# Altium PCB PCB2.PcbDoc
Units mm, origin at the board's own origin, x right, y up, seen from the top; angles counter-clockwise.
Board outline 139.83 x 163.58 mm, 2 copper layers (Top Layer, Bottom Layer); 66 components, 65 nets, 277 pads, 15 vias.
Unrouted connection lines stored in the file: 4.
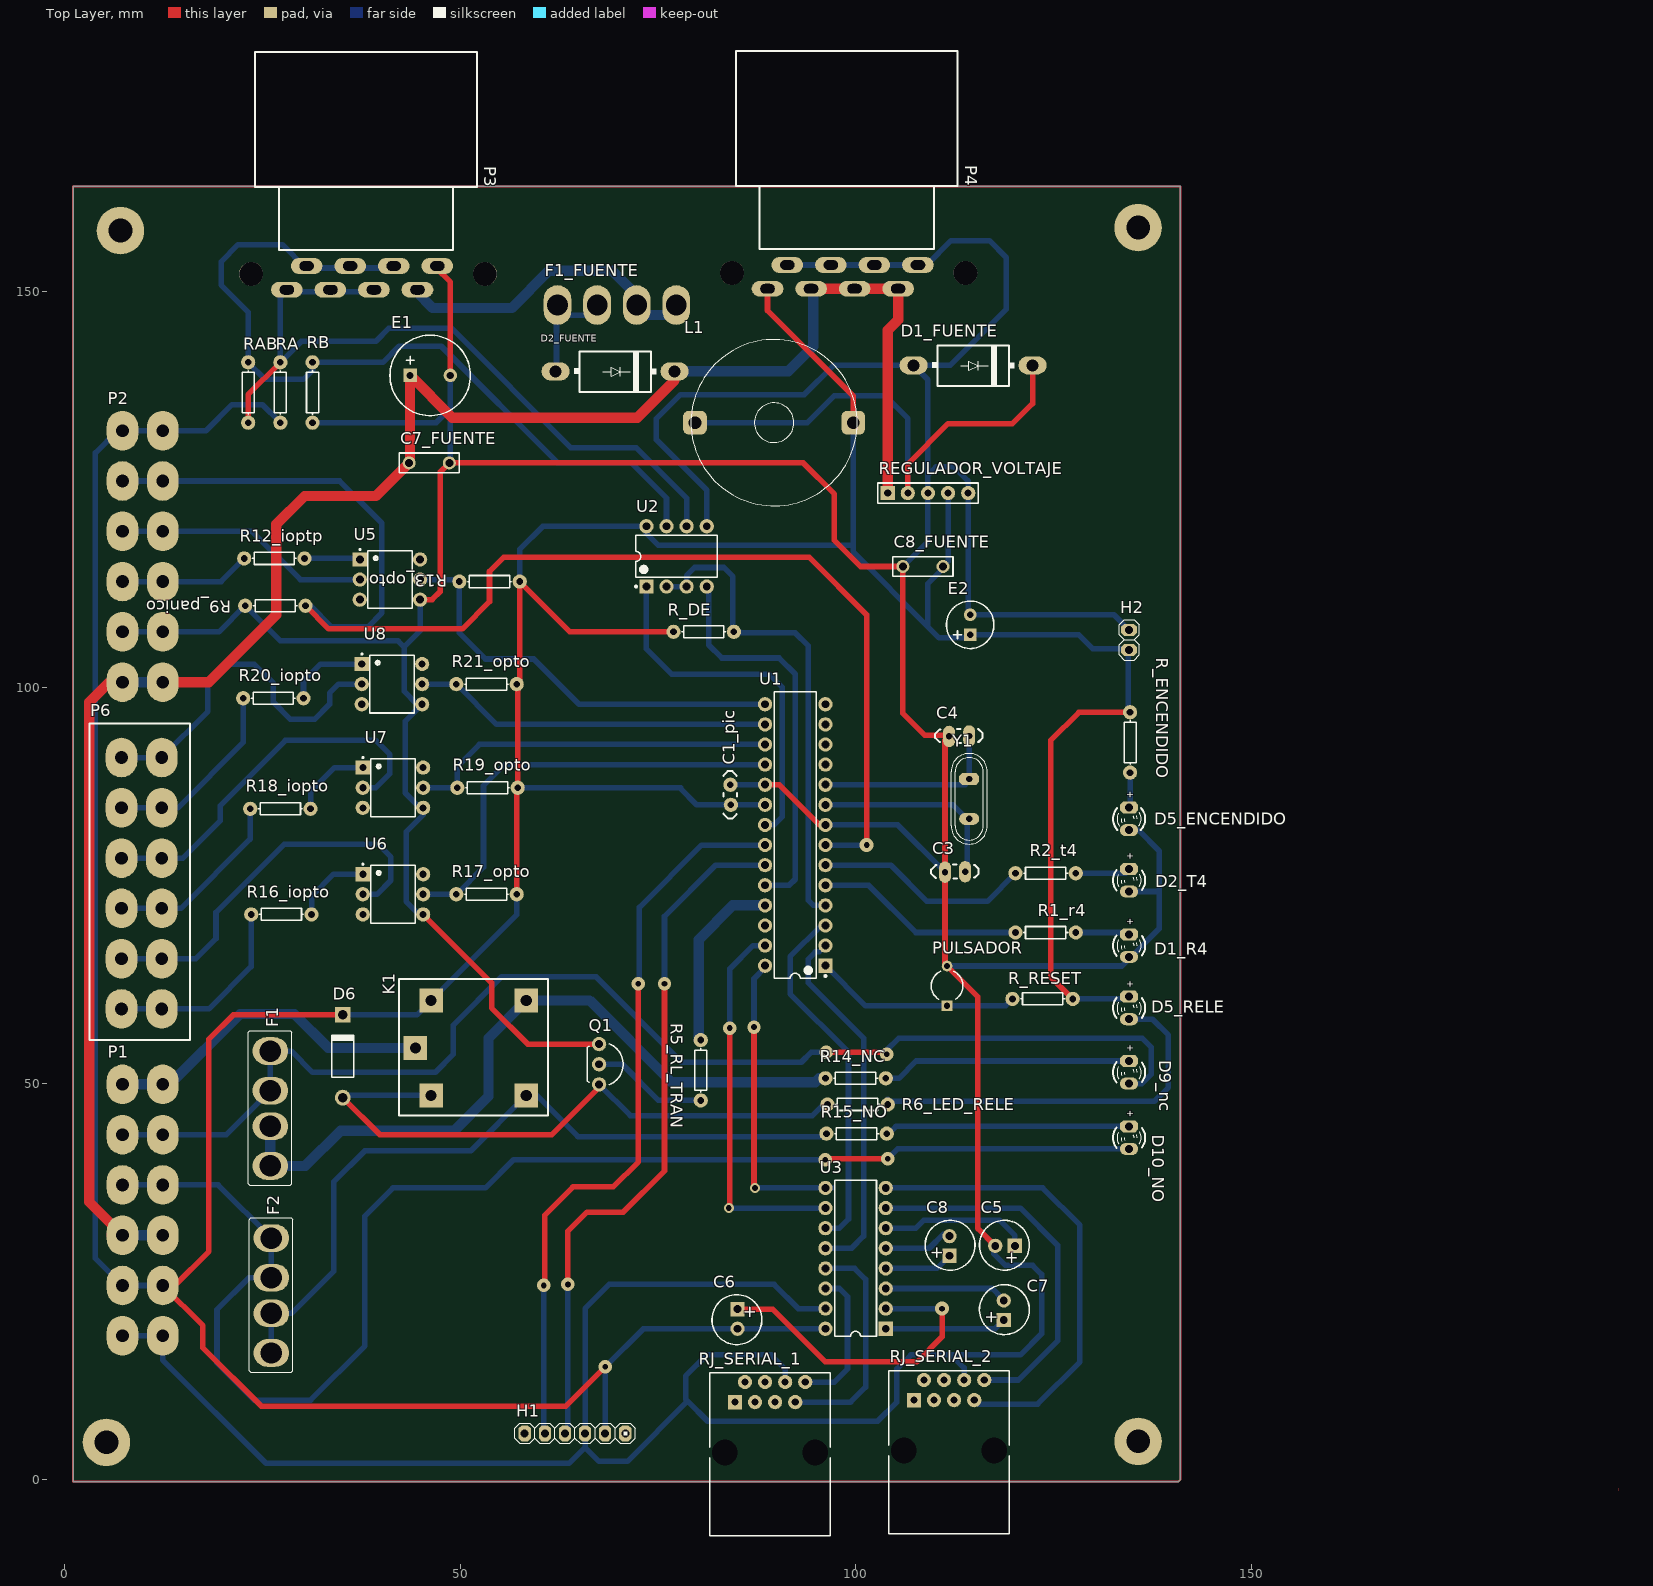
[diagram p0: Top Layer view]
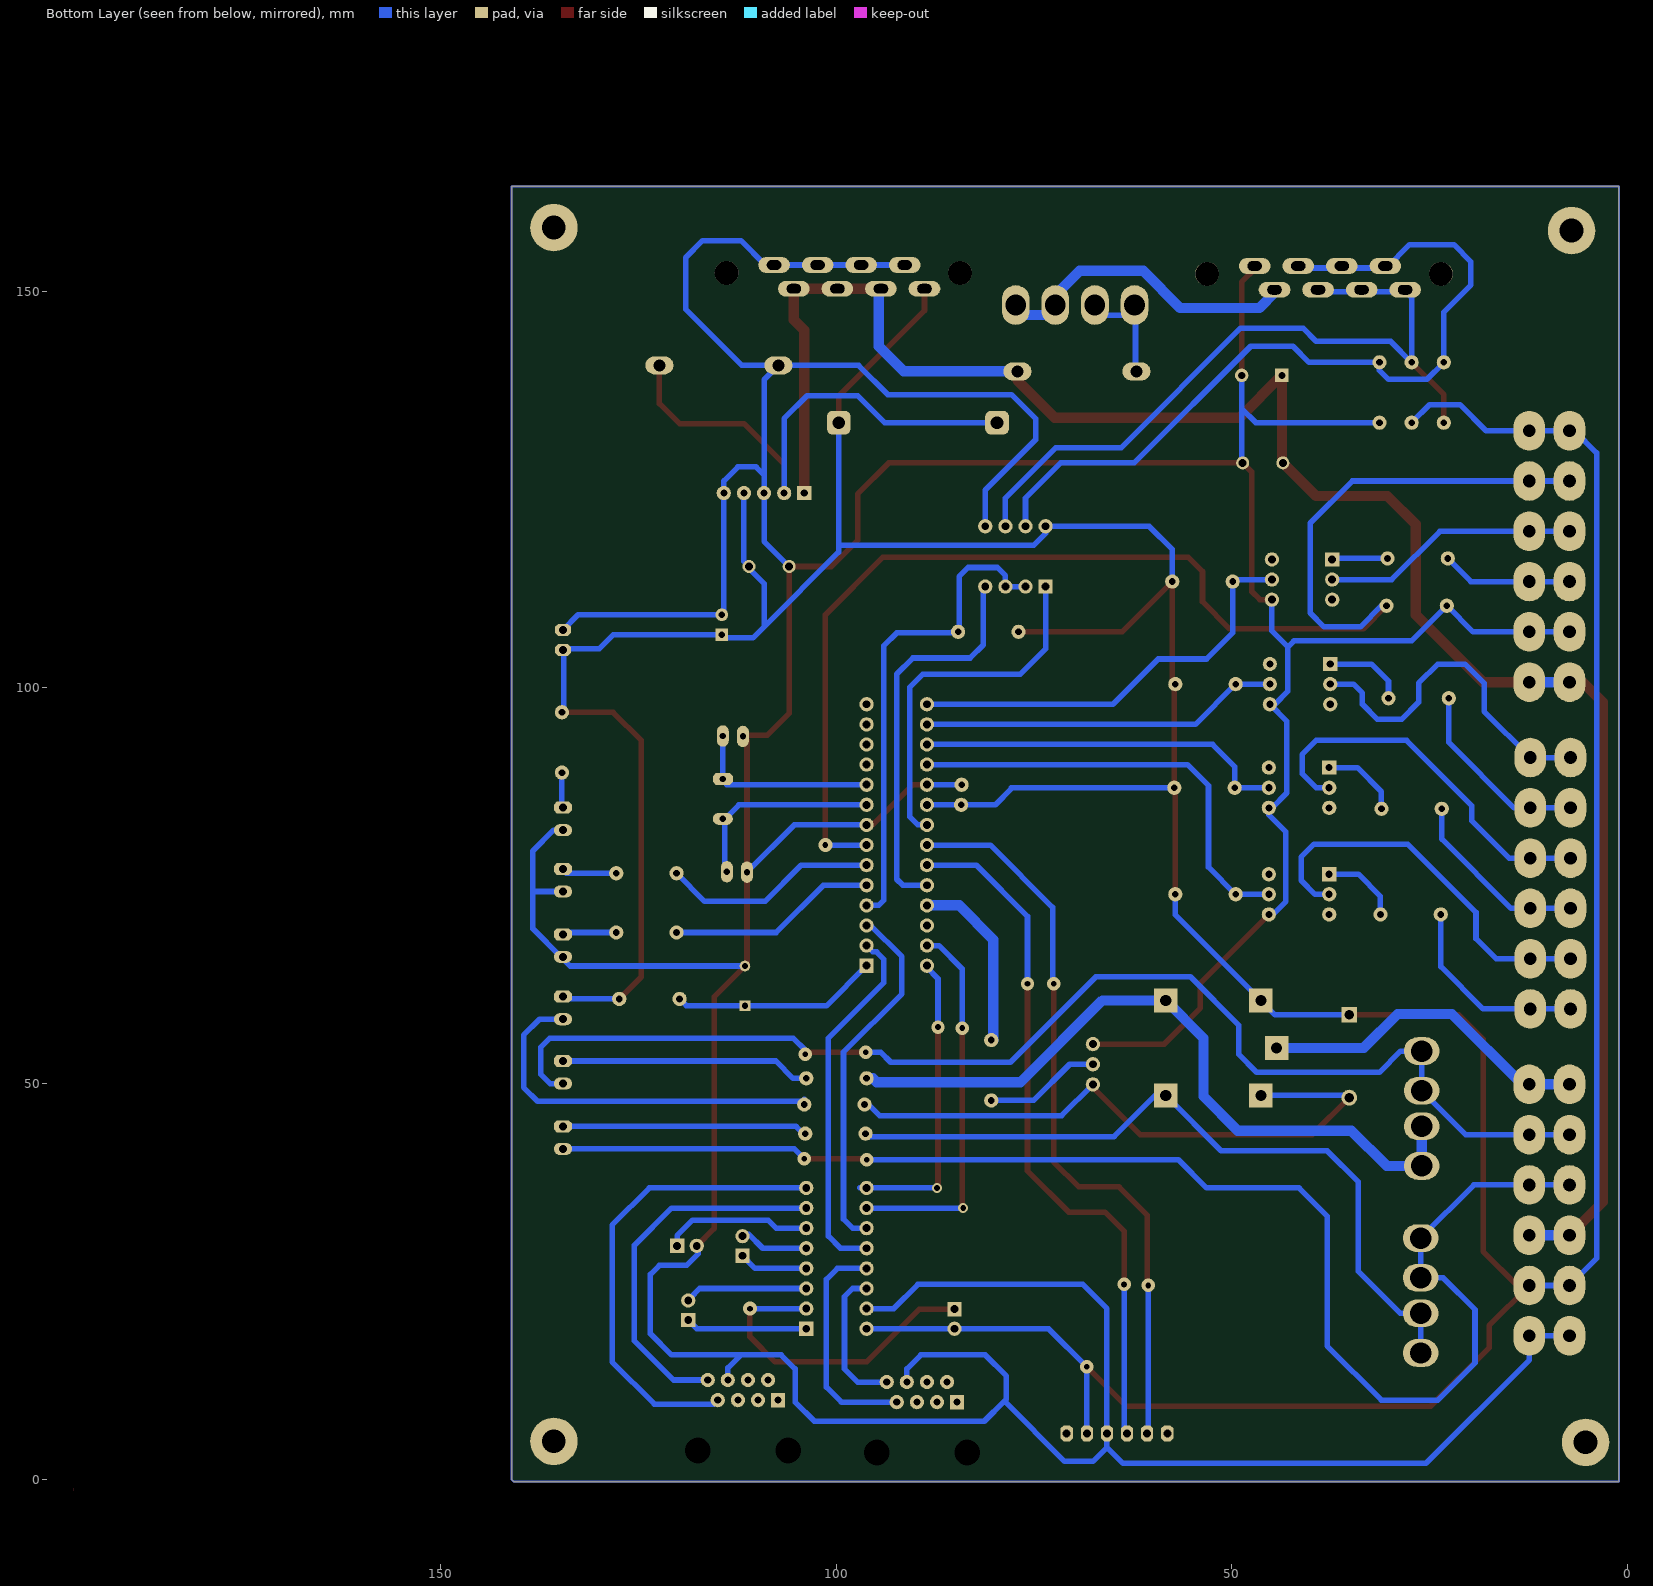
[diagram p1: Bottom Layer view, seen from below]

## Layer stack, top to bottom
Top Solder: solder mask 0.0102, Solder Resist, Dk 3.5
Top Layer: signal copper 0.0356
Dielectric 1: dielectric 0.32, FR-4, Dk 4.8
Bottom Layer: signal copper 0.0356
Bottom Solder: solder mask 0.0102, Solder Resist, Dk 3.5

## Board outline
1.143,-0.254 1.143,163.322 140.97,163.322 140.97,0 140.716,-0.254

## Design rules (kind name [scope] priority, off if disabled: settings)
Clearance [All] p1: gap=0.5
PolygonConnect [All] p1: connectstyle=Relief reliefconductorwidth=0.254 reliefentries=4 polygonreliefangle="90 Angle" airgapwidth=0.254
RoutingVias [All] p1: holewidth=0.711 width=1.27 viastyle="Through Hole" minholewidth=0.711 minwidth=1.27 maxholewidth=0.711 maxwidth=1.27
SolderMaskExpansion [All] p1: expansion=0.102
Width [All] p1: maxlimit=1.3 minlimit=0.7 preferedwidth=0.7
30 further rules are at their usual default settings.

## Components (designator, comment, footprint, x,y, rotation, side; value= is the part's Value field where it differs from the comment)
C1_pic "Cap" Lenteja#1 84.201,86.487 r90 top
C3 "Cap" Lenteja#2 112.522,76.708 r0 top
C4 "Cap" Lenteja#2 113.03,93.853 r0 top
C5 "Cap Pol1" "Radial 6.3x11" 118.745,29.591 r180 top
C6 "Cap Pol1" "Radial 6.3x11" 84.963,20.193 r270 top
C7 "Cap Pol1" "Radial 6.3x11" 118.745,21.463 r90 top
C7_FUENTE "VP44BY224JB" VP44-2.5 46.101,128.397 r0 top
C8 "Cap Pol1" "Radial 6.3x11" 111.887,29.591 r90 top
C8_FUENTE "VP44BY224JB" VP44-2.5 108.458,115.316 r0 top
D1_FUENTE "Diodo" 1N4000 122.301,140.716 r180 top
D1_R4 "LED0" "LED3MM green" 134.493,67.437 r90 top
D2_FUENTE "Diodo" 1N4000 77.089,139.954 r180 top
D2_T4 "LED0" "LED3MM green" 134.493,75.692 r90 top
D5_ENCENDIDO "LED0" "LED3MM green" 134.493,83.439 r90 top
D5_RELE "LED0" "LED3MM green" 134.493,59.563 r90 top
D6 "Diode 1N4001" DO-41 35.179,53.467 r90 top
D9_nc "LED0" "LED3MM green" 134.493,51.435 r90 top
D10_NO "LED0" "LED3MM green" 134.493,43.18 r90 top
E1 "Cap Pol1" C1000UF 43.688,139.446 r0 top
E2 "Cap2" C1UF 114.427,106.68 r90 top
F1 "Fuse" PORTA_FUSE 26.035,46.863 r90 top
F1_FUENTE "Fuse" fusible1 62.357,148.336 r0 top
F2 "Fuse" PORTA_FUSE 26.162,23.241 r90 top
H1 "Header 6" "Header 1X6" 63.246,5.842 r0 top
H2 "Header" "Header 1X2" 134.493,104.775 r90 top
K1 "Relay-SPDT" RELE 46.355,48.514 r0 top
L1 "Inductor Adj" Inductor_redondo 89.662,133.477 r0 top
P1 "Header 6" PCBComponent_1#1 1235.329,1270.381 r0 top
P2 "Header 6" PCBComponent_1#1 1235.329,1352.931 r0 top
P3 "MHDR1X8" 8PEQ_TAIYUE_OK 39.624,151.765 r180 top
P4 "MHDR1X8" 8PEQ_TAIYUE_OK 100.33,151.892 r180 top
P6 "Header 6" PCBComponent_1#2 1242.695,1314.704 r0 top
PULSADOR "Cap2" CAPR5-4X5 111.506,62.357 r90 top
Q1 "2N3904" 2N3904_OK 67.564,52.451 r0 top
R1_r4 "Res1" AXIAL-0.3 123.952,69.088 r0 top
R2_t4 "Res1" AXIAL-0.3 123.952,76.581 r0 top
R5_RL_TRAN "Res1" AXIAL-0.3 80.391,51.689 r270 top
R6_LED_RELE "Res1" AXIAL-0.3 100.203,47.371 r0 top
R9_panico "Res1" AXIAL-0.3 26.67,110.363 r180 top
R12_ioptp "Res1" AXIAL-0.3 26.543,116.332 r180 top
R13_opto "Res1" AXIAL-0.3 53.721,113.411 r180 top
R14_NC "Res1" AXIAL-0.3 99.949,50.673 r0 top
R15_NO "Res1" AXIAL-0.3 100.076,43.688 r0 top
R16_iopto "Res1" AXIAL-0.3 27.432,71.374 r180 top
R17_opto "Res1" AXIAL-0.3 53.34,73.914 r180 top
R18_iopto "Res1" AXIAL-0.3 27.305,84.709 r180 top
R19_opto "Res1" AXIAL-0.3 53.467,87.376 r180 top
R20_iopto "Res1" AXIAL-0.3 26.416,98.679 r180 top
R21_opto "Res1" AXIAL-0.3 53.34,100.457 r180 top
R_DE "Res1" AXIAL-0.3 80.772,107.061 r0 top
R_ENCENDIDO "Res1" AXIAL-0.3 134.62,93.091 r270 top
R_RESET "Res1" AXIAL-0.3 123.571,60.706 r180 top
RA "Res1" AXIAL-0.3 27.305,137.287 r90 top
RAB "Res1" AXIAL-0.3 23.241,137.287 r90 top
RB "Res1" AXIAL-0.3 31.369,137.287 r270 top
REGULADOR_VOLTAJE "LM2575T-5.0" HDR1X5 104.013,124.587 r0 top
RJ_SERIAL_1 "RJ45" 15-43-6233 89.154,-7.112 r0 top
RJ_SERIAL_2 "RJ45" 15-43-6233 111.76,-6.858 r0 top
U1 "PIC18F2550-I/SP" SPDIP300-SP28 92.329,81.407 r180 top
U2 "MAX485CPA" PA8 77.343,116.586 r90 top
U3 "MAX232N" N016 99.949,27.94 r90 top
U5 "4N33" DIP762W50P254L730H410Q6#1 41.148,113.665 r0 top
U6 "4N33" DIP762W50P254L730H410Q6#2 41.529,73.914 r0 top
U7 "4N33" DIP762W50P254L730H410Q6#2 41.529,87.376 r0 top
U8 "4N33" DIP762W50P254L730H410Q6#2 41.402,100.457 r0 top
Y1 "XTAL" "Cristal mini" 114.3,85.979 r270 top

## Footprints (in the part's own frame and the unit in brackets; to place one, negate y for a bottom-side part, rotate by r counter-clockwise, add the part's x,y. Pads: shape width x height; smd on the part's side, far side on the other; paste and mask are expansions set on the pad)
1N4000 [mil] "Diodo Rectificador de proposito general"
  oval 140x90 hole 60: 1(591.54,0) 2(0,0)
  silkscreen extent 90,-98 500,102, body extent -27,-102 615,106, height 183
2N3904_OK [mm]
  round 1.8 hole 1: 1(0,2.54) 2(0,0) 3(0,-2.54)
  silkscreen extent -1.48,-2.61 3.02,2.61
8PEQ_TAIYUE_OK [mm]
  round 3 hole 3: 1(-13.5,-0.5) 1(16,-0.5)
  oval 4x2 hole 1.2 slot 1.8 at 0 deg: 1(-5,1.5) 2(0.5,1.5) 3(6,1.5) 4(11.5,1.5) 5(-7.5,-1.5) 6(-2,-1.5) 7(3.5,-1.5) 8(9,-1.5)
  silkscreen extent -12.5,-28.5 15.5,-3.5
15-43-6233 [mm] "Connector; PCB Jack, Thru-Hole; 1-Port; Unshielded without Lightpipes; Right Angle"
  rect 1.8x1.8 hole 0.9: 1(-4.445,16.89)
  round 1.8 hole 0.9: 2(-3.175,19.43) 3(-1.905,16.89) 4(-0.635,19.43) 5(0.635,16.89) 6(1.905,19.43) 7(3.175,16.89) 8(4.445,19.43)
  round 2.95 hole 3.25 unplated: MH1(-5.715,10.54) MH2(5.715,10.54)
  silkscreen extent -7.62,0 7.62,20.58
AXIAL-0.3 [mm] "Axial Device, Thru-Hole; 2 Leads; 0.3 in Pin Spacing"
  round 1.8 hole 0.85: 1(-3.81,0) 2(3.81,0)
  silkscreen extent -2.77,-0.76 2.77,0.76
C1UF [mm]
  rect 1.6x1.6 hole 0.8: 1(0,0)
  round 1.6 hole 0.8: 2(2.54,0)
  silkscreen extent -1.73,-3 4.27,3
C1000UF [mm]
  rect 1.7x1.7 hole 0.9: 1(0,0)
  round 1.7 hole 0.9: 2(5.08,0)
  silkscreen extent -2.54,-5.08 7.62,5.08
CAPR5-4X5 [mm] "Capacitor; 2 Leads"
  rect 1.35x1.35 hole 0.8: 1(-2.5,0)
  round 1.35 hole 0.8: 2(2.5,0)
  silkscreen extent -1.69,-2 1.82,2
"Cristal mini" [mm] "Cristal de cuarzo empaque pequeño"
  oct 1.524x2.54 hole 0.8: 1(-2.5,0)
  oval 1.524x2.54 hole 0.8: 2(2.54,0)
  silkscreen extent -5.71,-2.29 5.71,2.29, body extent -5.63,-2.35 5.72,2.3, height 3.5
DIP762W50P254L730H410Q6#1 [mm]
  rect 1.8x1.8 hole 1: 1(-3.81,2.54)
  round 1.8 hole 1: 2(-3.81,0) 3(-3.81,-2.54) 4(3.81,-2.54) 5(3.81,0) 6(3.81,2.54)
  silkscreen extent -3.9,-3.65 2.8,3.9
DIP762W50P254L730H410Q6#2 [mm]
  rect 1.8x1.8 hole 0.9: 1(-3.81,2.54)
  round 1.8 hole 0.9: 2(-3.81,0) 3(-3.81,-2.54) 4(3.81,-2.54) 5(3.81,0) 6(3.81,2.54)
  silkscreen extent -3.9,-3.65 2.8,3.9
DO-41 [mm] "Diode, Axial; Body 5.2 x 2.7 mm (LxDia. max), Lead Dia. 0.86 mm (max)"
  round 2 hole 1.2: 1(-5.23,0)
  rect 2x2 hole 1.2: 2(5.23,0)
  silkscreen extent -2.65,-1.4 2.75,1.4
fusible1 [mm] "foot print para los socalos de los fusibles"
  oval 3.5x5 hole 2.6: 1(-0.05,0) 1(4.95,0) 2(9.95,0) 2(14.95,0)
HDR1X5 [mm] "Connector; Header; 5 Position"
  rect 1.8x1.8 hole 0.9: 1(0,0)
  round 1.8 hole 0.9: 2(2.54,0) 3(5.08,0) 4(7.62,0) 5(10.16,0)
  silkscreen extent -1.27,-1.27 11.43,1.27
"Header 1X2" [mil] "Conector Header 1 linea 2 terminales"
  oct 60x80 hole 40: 1(0,0) 2(100,0)
  silkscreen extent -50,-50 150,50, body extent -50,-49 150,49, height 341
"Header 1X6" [mil] "Conector Header 1 linea 6 terminales"
  oct 60x80 hole 40: 1(-200,0) 2(-100,0) 3(0,0) 4(100,0) 5(200,0) 6(300,0)
  silkscreen extent -250,-50 350,50, body extent -250,-48 350,50, height 344
Inductor_redondo [mm]
  rrect50% 3x3 hole 1.6: 1(10,0) 2(-10,0)
  silkscreen extent -10.5,-10.5 10.5,10.5
"LED3MM green" [mm] "Led de 3mm Verde"
  oct 1.524x2.3 hole 1.016: 1(1.425,0)
  oval 1.524x2.3 hole 1.016: 2(-1.425,0)
  silkscreen extent -1.3,-2.03 1.3,2.03, body extent -1.65,-1.58 1.65,1.71, height 5.51
Lenteja#1 [mm] "CAPACITOR CERAMICO"
  round 1.8 hole 0.813: 1(-1.276,0) 2(1.264,0.054)
  silkscreen extent -3.03,-0.8 2.98,0.95, body extent -2.93,-0.74 2.91,0.96, height 6.92
Lenteja#2 [mm] "CAPACITOR CERAMICO"
  oval 1.5x2.7 hole 0.813: 1(-1.276,0) 2(1.264,0.054)
  silkscreen extent -3.02,-0.8 2.98,0.95, body extent -2.93,-0.74 2.91,0.96, height 6.92
N016 [mm] "DIP; 16 Leads; Row Spacing 7.62 mm; Pitch 2.54 mm"
  rect 1.8x1.8 hole 1 mask+0.102: 1(-8.89,-3.81)
  round 1.8 hole 1 mask+0.102: 2(-6.35,-3.81) 3(-3.81,-3.81) 4(-1.27,-3.81) 5(1.27,-3.81) 6(3.81,-3.81) 7(6.35,-3.81) 8(8.89,-3.81) 9(8.89,3.81) 10(6.35,3.81) 11(3.81,3.81) 12(1.27,3.81) 13(-1.27,3.81) 14(-3.81,3.81) 15(-6.35,3.81) 16(-8.89,3.81)
  silkscreen extent -9.85,-2.65 9.85,2.65
PA8 [mm] "DIP, 8-Leads, Row Spacing 7.62mm, Pitch 2.54mm, Body 9.38x7.24mm"
  rect 1.8x1.8 hole 1 mask+0.102: 1(-3.81,3.81)
  round 1.8 hole 1 mask+0.102: 2(-3.81,1.27) 3(-3.81,-1.27) 4(-3.81,-3.81) 5(3.81,-3.81) 6(3.81,-1.27) 7(3.81,1.27) 8(3.81,3.81)
  silkscreen extent -3.93,-5.15 2.65,5.23, body extent -3.6,-5.15 3.6,5.15, height 4.58
PCBComponent_1#1 [mm]
  oval 4x5 hole 1.6: 1(-1227.963,-1220.47) 1(-1222.883,-1220.47) 2(-1227.963,-1226.82) 2(-1222.883,-1226.82) 3(-1227.963,-1233.17) 3(-1222.883,-1233.17) 4(-1227.963,-1239.52) 4(-1222.883,-1239.52) 5(-1227.963,-1245.87) 5(-1222.883,-1245.87) 6(-1227.963,-1252.22) 6(-1222.883,-1252.22)
PCBComponent_1#2 [mm]
  oval 4x5 hole 1.6: 1(-1235.456,-1223.518) 1(-1230.376,-1223.518) 2(-1235.456,-1229.868) 2(-1230.376,-1229.868) 3(-1235.456,-1236.218) 3(-1230.376,-1236.218) 4(-1235.456,-1242.568) 4(-1230.376,-1242.568) 5(-1235.456,-1248.918) 5(-1230.376,-1248.918) 6(-1235.456,-1255.268) 6(-1230.376,-1255.268)
  Top Overlay keep-out lines w0.254: -1239.52,-1259.205 -1239.52,-1219.2 -1226.82,-1219.2 -1226.82,-1259.205 -1239.52,-1259.205
  silkscreen extent -1239.52,-1259.2 -1226.82,-1219.2
PORTA_FUSE [mm]
  oval 3.5x4.5 hole 2.7: 1(-7.25,0) 1(-2.25,0) 2(2.25,0) 2(7.25,0)
  silkscreen extent -9.7,-2.7 9.8,2.8
"Radial 6.3x11" [mm] "Capacitor  Electrolitico Radial 6.3mm diametro  x 11mm de altura (2.5mm entre pines)"
  rect 1.8x1.8 hole 1: 1(-1.325,0.075)
  round 1.8 hole 1: 2(1.15,0.075)
  silkscreen extent -3.15,-3.15 3.15,3.15, body extent -3.27,-3.08 3.08,3.27, height 11.53
RELE [mm]
  rect 3x3 hole 1.4: 1(-2,6) 2(12,12) 3(12,0) 4(0,12) 5(0,0)
  silkscreen extent -4.06,-2.54 14.73,14.73
SPDIP300-SP28 [mm] "DIP, 28-Leads, Row Spacing 7.62mm, Pitch 2.54mm, Body 34.9x6.8mm"
  rect 1.8x1.8 hole 1 mask+0.102: 1(-3.81,16.51)
  round 1.8 hole 1 mask+0.102: 2(-3.81,13.97) 3(-3.81,11.43) 4(-3.81,8.89) 5(-3.81,6.35) 6(-3.81,3.81) 7(-3.81,1.27) 8(-3.81,-1.27) 9(-3.81,-3.81) 10(-3.81,-6.35) 11(-3.81,-8.89) 12(-3.81,-11.43) 13(-3.81,-13.97) 14(-3.81,-16.51) 15(3.81,-16.51) 16(3.81,-13.97) 17(3.81,-11.43) 18(3.81,-8.89) 19(3.81,-6.35) 20(3.81,-3.81) 21(3.81,-1.27) 22(3.81,1.27) 23(3.81,3.81) 24(3.81,6.35) 25(3.81,8.89) 26(3.81,11.43) 27(3.81,13.97) 28(3.81,16.51)
  silkscreen extent -3.94,-18.1 2.65,18.1, body extent -3.55,-18.1 3.55,18.1, height 5.08
VP44-2.5 [mm] "Capacitor, Ceramic, Thru-Hole, Dipped Radial; Body 7.6 x 2.5 mm (WxT) Pin Spacing 5.08 mm (typ)"
  round 1.65 hole 1: 1(-2.54,0) 2(2.54,0)
  silkscreen extent -3.8,-1.25 3.8,1.25

## Part data
C1_pic C3 C4: library part "Capacitor ceramico", "Capacitor ceramico"
C5 C6 C7 C8 E1: "Polarized Capacitor (Radial)"
C7_FUENTE C8_FUENTE: "Dipped Radial Multilayer Ceramic Capacitor X7R: 220nF, 100V"
D1_FUENTE D2_FUENTE: "Diodo rectificador"
D1_R4 D2_T4 D5_ENCENDIDO D5_RELE D9_nc D10_NO: "Typical INFRARED GaAs LED"
D6: "1 Amp General Purpose Rectifier"
E2 PULSADOR: "Capacitor"
F1 F1_FUENTE F2: library part "Fuse 1"
H1 P1 P2 P6: "Header, 6-Pin"
H2: library part "Header 2", "Header 2 pin"
K1: "Single-Pole Dual-Throw Relay"
L1: "Adjustable Inductor"
P3 P4: "Header, 8-Pin"
Q1: "NPN General Purpose Amplifier"
R1_r4 R2_t4 R5_RL_TRAN R6_LED_RELE R9_panico R12_ioptp R13_opto R14_NC R15_NO R16_iopto R17_opto R18_iopto R19_opto R20_iopto R21_opto R_DE R_ENCENDIDO R_RESET RA RAB RB: "Resistor"
REGULADOR_VOLTAJE: "SIMPLE SWITCHER 1A Step-Down Voltage Regulator"
RJ_SERIAL_1 RJ_SERIAL_2: library part 15-43-6233, "Right Angle, Standard Profile, RJ45-Keyed, Flange Mount PCB Jack"
U1: "High Performance, Enhanced Flash, USB Microcontroller with nanoWatt Technology, 32K Flash, 28-Pin SPDIP, Industrial Temperature Range"
U2: "Low-Power, Slew-Rate-Limited RS-485/RS-422 Transceiver"
U3: "Dual EIA-232 Driver/Receiver"
U5 U6 U7 U8: "OPTOISO 5KV DARL W/BASE 6DIP"
Y1: library part "Cristal de cuarzo", "Cristal de cuarzo"

## Free pads (board coordinates)
  round 6 hole 3: 0(5.334,4.699) 0(7.112,157.734) 0(135.636,4.826) 0(135.636,158.115)

## Via types
v1: diameter 1.7, hole 0.711, Top Layer to Bottom Layer, 11 vias
v2: diameter 1.8, hole 0.711, Top Layer to Bottom Layer, 2 vias
v3: diameter 1.27, hole 0.711, Top Layer to Bottom Layer, 2 vias

## Nets (pads, with @x,y where several pads share a name; then routed paths per layer and width w, separated by ;. In a path a pad name is that pad's centre, name@x,y a point inside that pad or via, vN(x,y) a via of type N, cw(c..) or ccw(c..) an arc to the next point about the centre after c; other vN are vias at no path point)
5VCC: C1_pic.1 C6.2 C8_FUENTE.2 D5_RELE.1 D6.2 E2.1 H1.5 H2.1 K1.4 L1.1 P1.5 P2.1 P4.4 R13_opto.1 R17_opto.1 R19_opto.1 R21_opto.1 R_DE.1 R_ENCENDIDO.1 R_RESET.1 RA.1 REGULADOR_VOLTAJE.4 U1.20 U2.8 U3.16 | length 624.5
  Top Layer w0.7: D6.2 21.359,58.697 18.288,55.626 18.288,28.829 13.97,24.511 12.446,24.511 17.526,19.431 17.526,16.637 24.892,9.271 63.373,9.271 v1(68.326,14.224) ; R17_opto.1 57.15,87.249 R19_opto.1 57.277,100.33 57.531,100.584 R13_opto.1 63.881,107.061 R_DE.1 ; P4.4 88.83,147.644 99.662,136.812 L1.1 ; R_RESET.1 124.587,63.5 124.587,93.345 128.143,96.901 R_ENCENDIDO.1
  Bottom Layer w0.7: P1.5@12.446,24.511 7.366,24.511 3.937,27.94 3.937,129.667 6.731,132.461 7.366,132.461 12.446,132.461 17.907,132.461 21.209,135.763 25.019,135.763 RA.1 ; D6.2 44.538,58.697 K1.4 57.15,71.309 R17_opto.1 ; R19_opto.1 77.851,87.376 77.851,87.249 79.889,85.211 C1_pic.1 ; R13_opto.1 57.531,117.475 60.452,120.396 U2.8 73.533,119.507 75.057,117.983 99.662,117.983 ; H1.5 v1(68.326,14.224) 73.145,19.043 C6.2 U3.16@96.132,19.043 ; C1_pic.1@84.207,85.217 U1.20 ; L1.1 99.662,117.983 ; C8_FUENTE.2 111.633,115.951 REGULADOR_VOLTAJE.4 ; C8_FUENTE.2@111.379,115.443 109.093,113.157 109.093,107.696 ; R_RESET.1 134.592,60.706 D5_RELE.1@134.874,60.988 ; R_ENCENDIDO.1@134.366,97.155 134.366,104.902 129.921,104.902 128.143,106.68 E2.1 114.046,106.299 110.49,106.299 109.093,107.696 ; 99.662,117.983 99.662,117.127 109.093,107.696
24VCC: C7_FUENTE.1 D2_FUENTE.2 E1.1 P1.4 P2.6 P4.1 P4.2 P4.3 REGULADOR_VOLTAJE.1 | length 249.3
  Top Layer w1.3: P1.4@7.366,30.861 3.175,35.052 3.175,98.171 5.715,100.711 P2.6@7.366,100.711 ; P2.6@12.446,100.711 18.288,100.711 26.797,109.22 26.797,120.65 30.353,124.206 39.37,124.206 C7_FUENTE.1 43.688,128.524 E1.1 49.022,134.112 72.39,134.112 77.089,138.811 D2_FUENTE.2 ; P4.3 P4.2 105.33,150.392 105.33,146.478 104.013,145.161 REGULADOR_VOLTAJE.1
  Top Layer w1.5: P1.4@6.096,30.861 P1.4@7.366,30.861
  Bottom Layer w1.3: P1.4@7.366,30.861 P1.4@12.446,30.861 ; P2.6@7.366,100.711 P2.6@12.446,100.711 ; D2_FUENTE.2 91.44,139.954 94.615,143.129 94.615,150.107 P4.3
  Bottom Layer w1.5: D2_FUENTE.2@76.454,139.954 D2_FUENTE.2 ; P4.3@94.107,150.169 P4.3
24VCC_IN: F1_FUENTE.2 P3.1 | length 39.3
  Bottom Layer w0.7: F1_FUENTE.2@72.18,147.066 F1_FUENTE.2@72.18,149.689
  Bottom Layer w1.3: P3.1@44.497,150.011 46.553,147.955 56.515,147.955 61.214,152.654 69.215,152.654 F1_FUENTE.2@72.18,149.689 ; F1_FUENTE.2@72.18,147.066 F1_FUENTE.2@77.18,147.066
A: P3.2 P3.3 P3.4 RA.2 RAB.1 U2.6 | length 95
  Top Layer w0.7: RAB.1 23.241,137.033 RA.2
  Bottom Layer w0.7: P3.2@38.997,150.011 33.497,150.011 27.997,150.011 27.305,149.319 RA.2 29.972,143.764 39.37,143.764 41.021,145.415 48.895,145.415 64.008,130.302 72.263,130.302 78.613,123.952 U2.6
B: P3.6 P3.7 P3.8 RAB.2 RB.1 U2.7 | length 105.5
  Bottom Layer w0.7: P3.6@41.497,153.011 30.497,153.011 27.552,155.956 21.971,155.956 19.812,153.797 19.812,150.876 23.241,147.447 RAB.2 25.4,138.938 30.226,138.938 31.369,140.081 RB.1 40.259,141.097 42.291,143.129 47.625,143.129 62.357,128.397 71.628,128.397 76.073,123.952 U2.7
BOTON_PANICO2: P2.2 R9_panico.1 U1.7 | length 173.1
  Top Layer w0.7: R9_panico.1 33.401,107.442 50.292,107.442 53.721,110.871 53.721,114.681 55.499,116.459 94.107,116.459 101.346,109.22 v2(101.346,80.137)
  Bottom Layer w0.7: P2.2@7.366,126.111 12.446,126.111 34.798,126.111 40.132,120.777 40.132,109.474 38.354,107.696 33.782,107.696 31.115,110.363 R9_panico.1 ; U1.7 v2(101.346,80.137)
DE1_485: R_DE.2 U1.4 U2.2 U2.3 | length 61.6
  Bottom Layer w0.7: U2.2 U2.3 78.613,114.173 79.629,115.189 83.312,115.189 84.455,114.046 84.455,107.188 R_DE.2 ; R_DE.2@85.344,107.061 85.471,106.934 92.329,106.934 93.98,105.283 93.98,73.152 94.615,72.517 U1.4
DI1_485: U1.24 U2.4 | length 50
  Bottom Layer w0.7: U2.4 81.407,112.522 81.407,105.41 83.058,103.759 90.297,103.759 92.329,101.727 92.329,75.819 91.567,75.057 U1.24
EN_BT: H1.6
GND: C1_pic.2 C3.1 C4.1 C5.2 C7_FUENTE.2 C8_FUENTE.1 D1_FUENTE.1 D1_R4.2 D2_T4.2 D5_ENCENDIDO.2 E1.2 E2.2 H1.4 H2.2 P1.6 P2.5 P3.5 P4.5 P4.6 P4.7 P4.8 PULSADOR.2 Q1.1 R9_panico.2 RB.2 REGULADOR_VOLTAJE.3 REGULADOR_VOLTAJE.5 RJ_SERIAL_1.6 RJ_SERIAL_2.6 U1.8 U1.19 U2.5 U3.15 U5.4 U6.4 U7.4 U8.4 | length 816.6
  Top Layer w0.7: U5.4 46.482,111.125 47.498,112.141 47.498,127.254 C7_FUENTE.2 93.345,128.397 97.282,124.46 97.282,118.618 100.584,115.316 C8_FUENTE.1 105.918,96.774 108.712,93.98 111.627,93.98 C4.1 111.246,93.345 C3.1 111.246,65.117 PULSADOR.2 115.403,60.96 115.403,31.708 C5.2 ; U6.4 53.975,62.738 53.975,59.563 58.547,54.991 Q1.1 ; P3.5@46.997,153.011 48.768,151.24 E1.2 ; U1.19 90.297,87.757 95.377,82.677 U1.8
  Bottom Layer w0.7: P1.6@7.366,18.161 12.446,18.161 12.446,15.113 25.527,2.032 63.754,2.032 65.786,4.064 ; P2.5@7.366,107.061 12.446,107.061 19.558,107.061 R9_panico.2 27.305,105.918 42.164,105.918 42.926,105.156 ; RB.2 46.99,133.477 48.768,135.255 ; U8.4@44.577,97.917 42.926,99.568 42.926,105.156 ; U5.4 44.958,107.188 42.926,105.156 ; U8.4 43.053,95.758 43.053,86.741 44.958,84.836 U7.4 45.339,83.947 43.18,81.788 43.18,73.025 44.831,71.374 U6.4 ; C7_FUENTE.2 48.768,128.524 48.768,135.255 ; E1.2 48.768,135.255 ; U2.5 81.153,124.968 74.803,131.318 74.803,133.985 77.851,137.033 93.472,137.033 97.155,140.716 D1_FUENTE.1 ; C1_pic.2@84.153,87.757 U1.19 ; RJ_SERIAL_1.6 91.059,13.97 89.281,15.748 81.153,15.748 78.486,13.081 78.486,10.16 78.74,9.906 ; P4.8 P4.7 P4.6 P4.5 108.942,153.392 112.014,156.464 116.84,156.464 118.999,154.305 118.999,147.828 111.887,140.716 D1_FUENTE.1 ; U3.15 92.71,21.59 89.662,24.638 68.834,24.638 65.786,21.59 H1.4 65.786,4.064 ; U1.8 105.277,82.677 C3.1 ; C8_FUENTE.1 109.093,118.491 REGULADOR_VOLTAJE.3 109.093,126.873 ; PULSADOR.2 133.592,64.857 134.747,66.012 138.303,69.568 138.303,79.375 135.664,82.014 D5_ENCENDIDO.2 ; RJ_SERIAL_2.6 113.665,14.097 112.014,15.748 ; E2.2@114.173,109.347 REGULADOR_VOLTAJE.5 114.173,126.111 112.395,127.889 110.109,127.889 109.093,126.873 ; E2.2 132.588,109.22 H2.2 ; C5.2@117.42,29.539 117.42,28.503 118.872,27.051 122.301,27.051 123.444,25.908 123.444,18.415 120.777,15.748 112.014,15.748 ; D2_T4.2@134.62,74.267 138.204,74.267 ; 65.786,4.064 67.564,2.286 71.12,2.286 78.74,9.906 ; 78.74,9.906 81.28,7.366 102.743,7.366 105.156,9.779 105.156,13.97 106.934,15.748 112.014,15.748 ; D1_FUENTE.1 109.093,138.899 109.093,126.873
LED_ENV_485: R2_t4.1 U1.6 | length 27.4
  Bottom Layer w0.7: U1.6 104.394,77.597 108.966,73.025 116.586,73.025 R2_t4.1
LED_RCB_485: R1_r4.1 U1.5 | length 26.5
  Bottom Layer w0.7: U1.5 101.6,75.057 107.569,69.088 R1_r4.1
NetC3_2: C3.2 U1.9 Y1.2 | length 25.4
  Bottom Layer w0.7: U1.9 112.268,85.217 114.046,83.439 114.046,77.022 C3.2@113.792,76.768
NetC4_2: C4.2 U1.10 Y1.1 | length 24
  Bottom Layer w0.7: U1.10 113.792,87.757 113.792,88.479 114.294,88.981 C4.2
NetC5_1: C5.1 U3.6 | length 18.8
  Bottom Layer w0.7: U3.6 107.569,31.75 108.585,32.766 118.11,32.766 120.07,30.806 C5.1
NetC6_1: C6.1 U3.2 | length 40.3
  Top Layer w0.7: C6.1 89.48,21.518 96.139,14.859 107.696,14.859 110.871,18.034 v2(110.871,21.59)
  Bottom Layer w0.7: U3.2 v2@110.617,21.59
NetC7_1: C7.1 U3.1 | length 15.4
  Bottom Layer w0.7: U3.1 117.582,19.05 C7.1
NetC7_2: C7.2 U3.3 | length 15.7
  Bottom Layer w0.7: U3.3 117.221,24.13 118.387,22.964 C7.2@118.387,22.329
NetC8_1: C8.1 U3.4 | length 8.7
  Bottom Layer w0.7: U3.4 110.216,26.67 C8.1
NetC8_2: C8.2 U3.5 | length 8.9
  Bottom Layer w0.7: U3.5 109.256,29.21 111.034,30.988 111.565,30.988 C8.2
NetD1_FUENTE_2: D1_FUENTE.2 L1.2 REGULADOR_VOLTAJE.2 | length 66.3
  Top Layer w0.7: REGULADOR_VOLTAJE.2 106.553,128.27 111.633,133.35 119.761,133.35 122.301,135.89 D1_FUENTE.2
  Bottom Layer w0.7: L1.2 93.853,133.477 97.282,136.906 103.632,136.906 106.553,133.985 REGULADOR_VOLTAJE.2
NetD1_R4_1: D1_R4.1 R1_r4.2 | length 7.1
  Bottom Layer w0.7: R1_r4.2 134.521,69.088 D1_R4.1@134.747,68.862
NetD2_FUENTE_1: D2_FUENTE.1 F1_FUENTE.1 | length 12.2
  Bottom Layer w0.7: D2_FUENTE.1@62.18,139.827 62.18,147.066 F1_FUENTE.1@67.18,147.066
NetD2_T4_1: D2_T4.1 R2_t4.2 | length 7.1
  Bottom Layer w0.7: R2_t4.2 134.084,76.581 D2_T4.1@134.62,77.117
NetD5_ENCENDIDO_1: D5_ENCENDIDO.1 R_ENCENDIDO.2 | length 4.5
  Bottom Layer w0.7: D5_ENCENDIDO.1 134.62,84.991 R_ENCENDIDO.2
NetD5_RELE_2: D5_RELE.2 R6_LED_RELE.2 | length 48.3
  Bottom Layer w0.7: R6_LED_RELE.2@104.013,48.006 104.267,47.752 137.668,47.752 139.446,49.53 139.446,56.134 137.442,58.138 D5_RELE.2@134.874,58.138
NetD6_1: D6.1 K1.5 Q1.3 R6_LED_RELE.1 | length 79.9
  Top Layer w0.7: D6.1 39.855,43.561 61.595,43.561 67.945,49.911 Q1.3
  Bottom Layer w0.7: D6.1 35.456,48.514 K1.5 ; Q1.3 71.501,45.974 94.488,45.974 R6_LED_RELE.1@96.139,47.625
NetD9_nc_1: D9_nc.1 R14_NC.2 | length 32
  Bottom Layer w0.7: R14_NC.2 105.41,50.673 107.597,52.86 D9_nc.1@134.874,52.86
NetD9_nc_2: D9_nc.2 F1.2 P1.2 | length 158.2
  Top Layer w0.7: v1(96.266,53.975) v1@103.632,53.975
  Bottom Layer w0.7: P1.2@7.366,43.561 12.446,43.561 20.483,43.561 26.035,49.113 26.035,54.113 28.691,54.113 31.369,51.435 46.863,51.435 49.149,53.721 49.149,57.404 55.245,63.5 67.183,63.5 77.978,52.705 93.091,52.705 94.361,53.975 v1(96.266,53.975) ; v1(103.886,53.721) 103.886,54.229 105.41,55.753 136.144,55.753 137.287,54.61 137.287,51.181 136.116,50.01 D9_nc.2@134.874,50.01
NetD10_NO_1: D10_NO.1 R15_NO.2 | length 31.6
  Bottom Layer w0.7: R15_NO.2@103.632,43.815 104.267,43.815 105.057,44.605 D10_NO.1@134.874,44.605
NetD10_NO_2: D10_NO.2 F2.2 P1.3 | length 181.9
  Top Layer w0.7: v1@96.266,40.513 v1(104.013,40.513)
  Bottom Layer w0.7: P1.3@7.366,37.211 12.446,37.211 19.442,37.211 26.162,30.491 26.162,25.491 23.332,25.491 19.304,21.463 19.304,14.732 24.003,10.033 31.115,10.033 37.973,16.891 37.973,33.274 41.529,36.83 53.213,36.83 56.769,40.386 v1(96.139,40.386) ; v1(104.013,40.513) 105.255,41.755 D10_NO.2@134.874,41.755
NetP2_3: P2.3 U5.2 | length 32.5
  Bottom Layer w0.7: P2.3@7.366,119.761 12.446,119.761 23.749,119.761 29.845,113.665 U5.2
NetP2_4: P2.4 R12_ioptp.2 | length 16.6
  Bottom Layer w0.7: P2.4@7.366,113.411 12.446,113.411 19.812,113.411 R12_ioptp.2
NetP6_1: P6.1 U8.2 | length 44.3
  Bottom Layer w0.7: P6.1@7.239,91.186 12.319,91.186 18.161,97.028 18.161,100.584 20.574,102.997 24.003,102.997 26.416,100.584 26.416,98.171 28.575,96.012 31.623,96.012 33.528,97.917 33.528,99.314 34.671,100.457 U8.2
NetP6_2: P6.2 R20_iopto.2 | length 24.4
  Bottom Layer w0.7: P6.2@7.239,84.836 12.319,84.836 14.351,84.836 22.606,93.091 R20_iopto.2
NetP6_3: P6.3 U7.2 | length 48.5
  Bottom Layer w0.7: P6.3@7.239,78.486 12.319,78.486 14.986,78.486 19.685,83.185 19.685,85.09 27.94,93.345 39.37,93.345 41.148,91.567 41.148,89.154 39.37,87.376 U7.2
NetP6_4: P6.4 R18_iopto.2 | length 23.7
  Bottom Layer w0.7: P6.4@7.239,72.136 12.319,72.136 14.732,72.136 23.495,80.899 R18_iopto.2
NetP6_5: P6.5 U6.2 | length 49.9
  Bottom Layer w0.7: P6.5@7.239,65.786 12.319,65.786 16.637,65.786 19.177,68.326 19.177,71.628 27.813,80.264 39.624,80.264 41.275,78.613 41.275,75.692 39.497,73.914 U6.2
NetP6_6: P6.6 R16_iopto.2 | length 25.2
  Bottom Layer w0.7: P6.6@7.239,59.436 12.319,59.436 18.288,59.436 23.622,64.77 R16_iopto.2
NetPULSADOR_1: PULSADOR.1 R_RESET.2 U1.1 | length 26
  Bottom Layer w0.7: U1.1 101.219,59.817 PULSADOR.1@111.466,59.817 ; PULSADOR.1 118.912,59.857 R_RESET.2
NetQ1_2: Q1.2 R5_RL_TRAN.2 | length 14.6
  Bottom Layer w0.7: Q1.2 70.485,52.451 75.057,47.879 R5_RL_TRAN.2@80.264,47.879
NetR12_ioptp_1: R12_ioptp.1 U5.1 | length 7
  Bottom Layer w0.7: R12_ioptp.1 37.211,116.332 U5.1
NetR16_iopto_1: R16_iopto.1 U6.1 | length 9.9
  Bottom Layer w0.7: R16_iopto.1 31.242,73.66 34.036,76.454 U6.1
NetR18_iopto_1: R18_iopto.1 U7.1 | length 10
  Bottom Layer w0.7: R18_iopto.1 31.115,86.868 34.163,89.916 U7.1
NetR20_iopto_1: R20_iopto.1 U8.1 | length 10.4
  Bottom Layer w0.7: R20_iopto.1 30.226,100.838 32.385,102.997 U8.1
OPTO2: R13_opto.2 U1.15 U5.5 | length 53.5
  Bottom Layer w0.7: U5.5 R13_opto.2@49.657,113.665 ; R13_opto.2 49.911,106.934 53.213,103.632 59.309,103.632 65.024,97.917 U1.15
OPTO3: R17_opto.2 U1.18 U6.5 | length 56
  Bottom Layer w0.7: U6.5 R17_opto.2 52.959,77.343 52.959,87.63 55.626,90.297 U1.18
OPTO4: R19_opto.2 U1.17 U7.5 | length 47
  Bottom Layer w0.7: U7.5 R19_opto.2 49.657,90.043 52.451,92.837 U1.17
OPTO5: R21_opto.2 U1.16 U8.5 | length 45.4
  Bottom Layer w0.7: U8.5 R21_opto.2 54.61,95.377 U1.16
RELE1: R5_RL_TRAN.1 U1.25 | length 22.9
  Bottom Layer w1.3: R5_RL_TRAN.1@80.137,55.499 80.137,68.199 84.455,72.517 U1.25
RELE1C: K1.1 P1.1 | length 42.4
  Bottom Layer w1.3: P1.1@7.366,49.911 12.446,49.911 13.335,49.911 22.225,58.801 29.083,58.801 33.37,54.514 K1.1
RELE1NC: F1.1 K1.2 R14_NC.1 | length 91.8
  Bottom Layer w1.3: F1.1@26.035,44.613 26.035,39.613 30.469,39.613 34.925,44.069 49.276,44.069 53.594,48.387 53.594,55.753 K1.2 66.359,60.514 76.708,50.165 94.869,50.165 R14_NC.1@95.377,50.673
RELE1NO: F2.1 K1.3 R15_NO.1 | length 95.5
  Bottom Layer w0.7: F2.1@26.162,15.991 26.162,20.991 28.738,20.991 34.036,26.289 34.036,37.592 37.973,41.529 51.37,41.529 K1.3 59.69,48.514 64.897,43.307 95.885,43.307 96.139,43.561 R15_NO.1@96.393,43.561
RO1_485: U1.21 U2.1 | length 46
  Bottom Layer w0.7: U2.1 73.533,104.902 76.708,101.727 89.027,101.727 90.678,100.076 90.678,83.693 89.662,82.677 U1.21
RS232_RX_MONITOREO: RJ_SERIAL_1.7 U3.13 | length 28.9
  Bottom Layer w0.7: RJ_SERIAL_1.7 99.313,9.778 101.219,11.684 101.219,25.273 99.822,26.67 U3.13
RS232_RXPC: RJ_SERIAL_2.7 U3.8 | length 59.5
  Bottom Layer w0.7: U3.8 123.571,36.83 128.27,32.131 128.27,14.859 122.936,9.525 115.442,9.525 RJ_SERIAL_2.7
RS232_TX_MONITOREO: RJ_SERIAL_1.8 U3.14 | length 18.4
  Bottom Layer w0.7: RJ_SERIAL_1.8 97.281,12.318 98.933,13.97 98.933,23.114 97.917,24.13 U3.14
RS232_TXPC: RJ_SERIAL_2.8 U3.7 | length 47.1
  Bottom Layer w0.7: U3.7 120.777,34.29 125.476,29.591 125.476,17.526 120.522,12.572 RJ_SERIAL_2.8
RX_BT: H1.2 U1.22 | length 93.6
  Top Layer w0.7: v1(60.579,24.511) 60.706,24.638 60.706,33.401 64.262,36.957 69.342,36.957 72.517,40.132 v1(72.517,62.611)
  Bottom Layer w0.7: v1(60.579,24.511) 60.579,5.969 H1.2 ; v1(72.517,62.611) 72.644,62.738 72.644,72.263 80.518,80.137 U1.22
STATE_BT: H1.1
TTL_RX1: U1.28 U3.9 | length 38.3
  Top Layer w0.7: v3@87.122,36.957 v1(87.122,57.15)
  Bottom Layer w0.7: v1(87.122,57.15) 87.122,63.246 88.519,64.643 U1.28 ; v3(87.249,36.83) U3.9 U3.9@96.982,36.83
TTL_RX2: U1.2 U3.12 | length 46.2
  Bottom Layer w0.7: U3.12 99.441,29.21 100.965,30.734 100.965,55.753 93.98,62.738 93.98,65.74 94.887,66.647 95.349,66.647 U1.2
TTL_TX1: U1.27 U3.10 | length 47.9
  Top Layer w0.7: v3@84.074,34.417 v1(84.074,57.023)
  Bottom Layer w0.7: v3(83.947,34.29) U3.10 ; v1(84.074,57.023) 84.074,64.516 86.995,67.437 U1.27
TTL_TX2: U1.3 U3.11 | length 45.7
  Bottom Layer w0.7: U3.11 97.917,31.75 99.06,32.893 99.06,53.975 91.694,61.341 91.694,66.04 95.631,69.977 U1.3
TX_BT: H1.3 U1.23 | length 87.8
  Top Layer w0.7: v1(63.627,24.638) 63.627,31.369 66.04,33.782 70.612,33.782 75.819,38.989 v1(75.819,62.611)
  Bottom Layer w0.7: H1.3 63.627,6.223 v1(63.627,24.638) ; v1@75.819,63.373 75.819,71.12 82.296,77.597 U1.23
pads on no net: RJ_SERIAL_1.1 RJ_SERIAL_1.2 RJ_SERIAL_1.3 RJ_SERIAL_1.4 RJ_SERIAL_1.5 RJ_SERIAL_1.MH1 RJ_SERIAL_1.MH2 RJ_SERIAL_2.1 RJ_SERIAL_2.2 RJ_SERIAL_2.3 RJ_SERIAL_2.4 RJ_SERIAL_2.5 RJ_SERIAL_2.MH1 RJ_SERIAL_2.MH2 U1.11 U1.12 U1.13 U1.14 U1.26 U5.3 U5.6 U6.3 U6.6 U7.3 U7.6 U8.3 U8.6

## Other copper
Multi-Layer:
  lines w0.254: 1.143,-0.254 1.143,0.635 1.143,163.322 140.97,163.322 140.97,0 140.716,-0.254 1.143,-0.254

## Silkscreen, mask and mechanical layers (free items; w line width, h text height)
Mechanical 1:
  lines w0.254: -8.278,1.929 -7.772,0.404 ; -8.026,0.404 -7.518,0.403 ; -8.004,161.799 -7.493,163.322 ; -7.747,163.322 -7.239,163.322 ; -7.647,73.331 -7.772,0.404 ; -7.618,90.395 -7.493,163.322 ; -7.262,1.927 -7.772,0.404 ; -6.988,161.797 -7.493,163.322 ; -2.032,197.866 -2.032,198.374 ; -0.509,197.609 -2.032,198.12 ; -0.507,198.625 -2.032,198.12 ; 60.747,198.008 -2.032,198.12 ; 78.064,197.978 140.843,197.866 ; 139.318,197.361 140.843,197.866 ; 139.32,198.377 140.843,197.866 ; 140.843,197.612 140.843,198.12
  text "142.875 (mm)" at 60.999,197.094 h1.52 r359.9
  text "162.919 (mm)" at -6.733,73.584 h1.52 r89.9

## Text inside footprints (layer, text, board x,y; h text height)
C5: Top Overlay "+" at 120.57,28.616 h1.5 r180
C6: Top Overlay "+" at 85.938,22.018 h1.5 r270
C7: Top Overlay "+" at 117.77,19.638 h1.5 r90
C8: Top Overlay "+" at 110.912,27.766 h1.5 r90
D1_R4: Top Overlay "+" at 135.018,70.012 h0.8 r90
D2_T4: Top Overlay "+" at 135.018,78.267 h0.8 r90
D5_ENCENDIDO: Top Overlay "+" at 135.018,86.014 h0.8 r90
D5_RELE: Top Overlay "+" at 135.018,62.138 h0.8 r90
D9_nc: Top Overlay "+" at 135.018,54.01 h0.8 r90
D10_NO: Top Overlay "+" at 135.018,45.755 h0.8 r90